# Altium PCB PCB.PcbDoc (part 3 of 3)
Units mm, origin at the board's own origin, x right, y up, seen from the top; angles counter-clockwise.
Board outline 200 x 125 mm, 2 copper layers (Top Layer, Bottom Layer), stack 1.56 mm thick; 157 components, 82 nets, 483 pads, 140 vias.
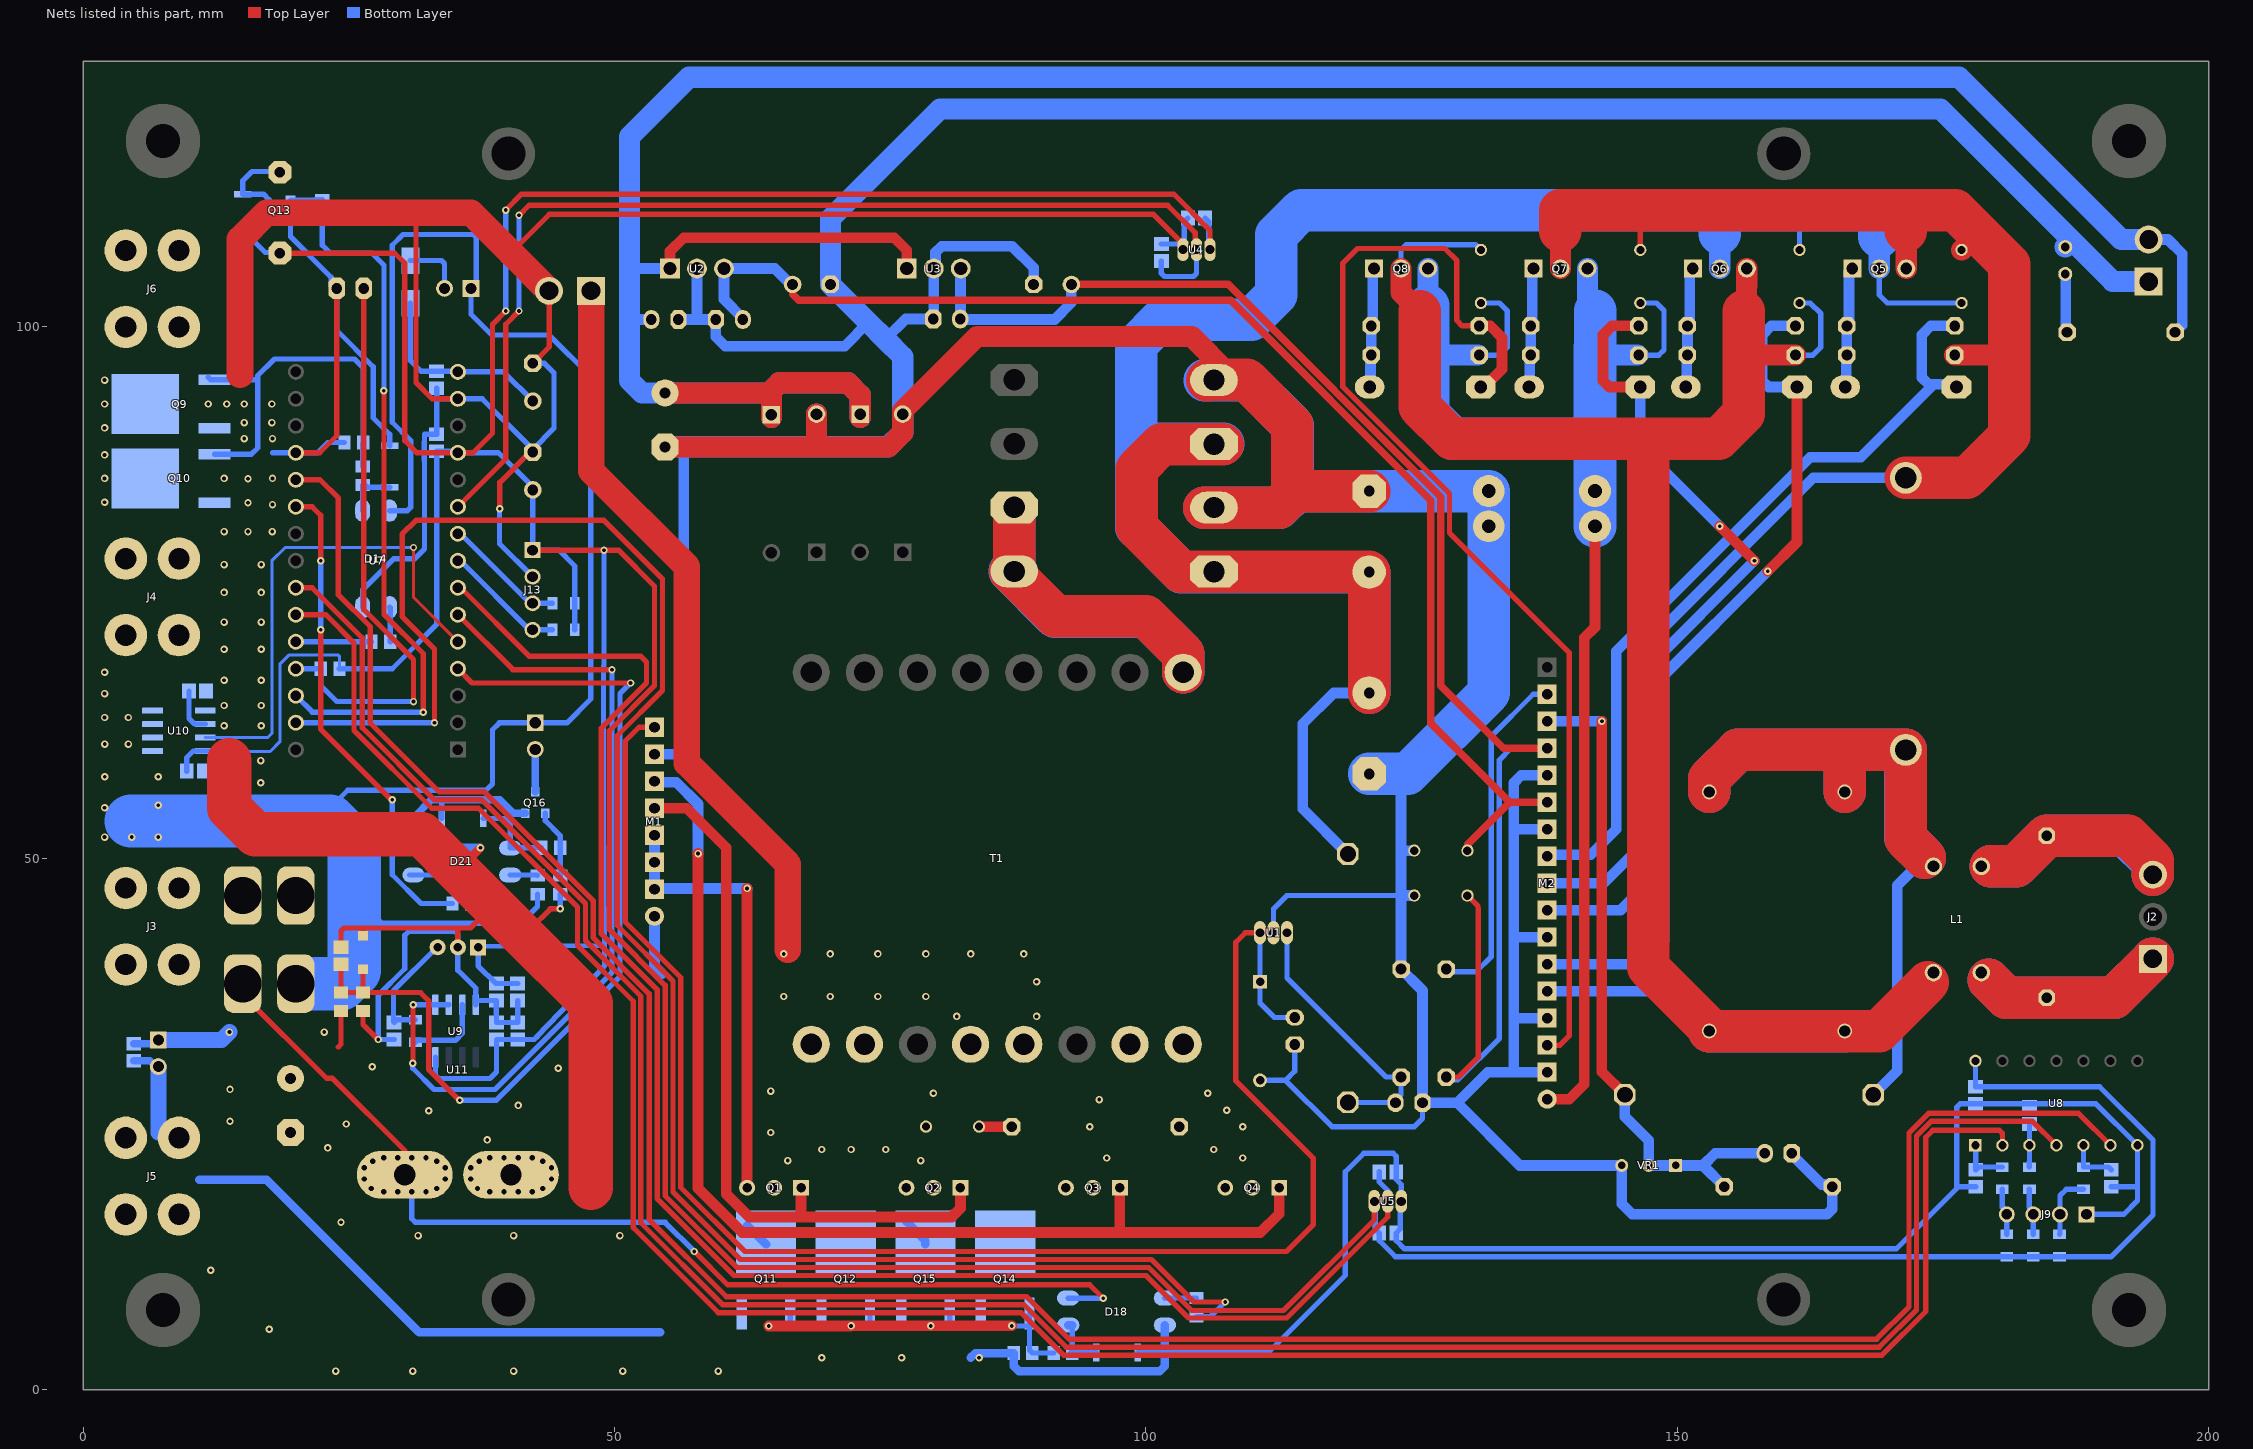
[diagram p2: the nets of this part, all layers, seen from the top]

## Via types
v1: diameter 0.7, hole 0.35, Top Layer to Bottom Layer, 82 vias
v2: diameter 0.7, hole 0.35, Top Layer to Bottom Layer, tented both sides, 55 vias
v3: diameter 0.7, hole 0.35, Top Layer to Bottom Layer, tented top, 3 vias

## Nets (pads, with @x,y where several pads share a name; then routed paths per layer and width w, separated by ;. In a path a pad name is that pad's centre, name@x,y a point inside that pad or via, vN(x,y) a via of type N, cw(c..) or ccw(c..) an arc to the next point about the centre after c; other vN are vias at no path point) (continued)
380VAC-: D8.K D9.A T1.9 | length 53.6
  Top Layer w4: D9.A@87.25,77 D9.A@87.602,77 ; D8.K@87.602,82.4 D9.A@87.602,77 ; T1.9@103.5,67.5 103.5,69.25 99.979,72.771 91.479,72.771 87.602,76.648 D9.A@87.602,77
  Bottom Layer w4: D9.A@87.2,77 91.463,72.737 100.013,72.737 103.5,69.25 T1.9@103.5,67.5 ; D9.A@87.602,77 87.4,77.202 87.602,77.404 D8.K@87.602,82.4
+5: C22.2 C23.2 C25.+ C27.2 C31.2 C33.2 C34.1 C35.2 C36.1 C37.2 C39.1 D17.C J13.1 R19.1 R20.1 R21.1 R29.2 R33.1 R36.1 U4.1 U5.1 U6.+ U7.12 U8.14 U9.8 U10.8 U11.1 | length 556.4
  Top Layer w0.5: U6.+@18.5,106.94 29.31,106.94 30.25,106 30.25,89.303 31.393,88.16 36.66,88.16 38.5,90 38.5,100.25 v1(39.75,101.5) ; v1(39.75,111) 41.25,112.5 102.615,112.5 106.02,109.095 U4.1@106.02,107.275 ; J13.1@42.275,79 42.75,79.475 42.75,79 v1(49,79) 50.35,79 53.75,75.6 53.75,66.25 49.5,62 49.5,43.297 54.75,38.047 54.75,18.25 61.5,11.5 100.256,11.5 104.309,7.447 112.947,7.447 121.48,15.98 U5.1@121.48,17.725
  Bottom Layer w0.3: C36.1@13.75,60.05 17.58,60.05 18.503,60.973 18.503,68.278 19.35,69.125 23.997,69.125 24.097,69.025 R29.2@24.097,67.84
  Bottom Layer w0.5: C35.2@9.74,58.2 9.74,59.49 10.345,60.095 U10.8@11.475,60.095 13.705,60.095 C36.1@13.75,60.05 ; D17.C@15,108.6 15.525,108.6 17.125,107 U6.+@18.5,107 ; R29.2@24.097,67.84 29.077,67.84 33.25,72.013 C27.2@33.25,88.305 35.105,88.305 U7.12@35.25,88.16 39.062,88.16 42.3,84.922 C25.+@42.3,84.672 42.3,79.025 J13.1@42.275,79 44.75,79 46.25,77.5 R33.1@46.25,74 R36.1@46.25,71.5 ; U9.8@33.135,31.28 33.135,29.583 33.428,29.29 38.263,29.29 38.881,29.908 C33.2@38.881,32.95 C34.1@40.881,32.95 42.435,32.95 42.703,33.219 49.047,39.882 49.047,41.789 ; v1(39.75,101.5) v1(39.75,111) ; C39.1@40.87,38.222 C37.2@38.87,38.222 38.82,38.222 37.16,39.882 U11.1@37.16,41.625 37.16,41.7 48.948,41.788 49.047,41.789 ; v1(49,79) 49,68.136 48.947,68.083 48.947,54.188 49.047,42.493 49.047,41.789 ; C22.2@105.55,110.25 105.911,109.889 105.911,107.384 U4.1@106.02,107.275 ; U5.1@121.48,17.725 121.589,17.616 121.589,15.111 C23.2@121.95,14.75 121.95,14.025 123.455,12.52 R19.1@181,12.52 R20.1@183.5,12.52 R21.1@185.95,12.52 186.575,12.52 186.595,12.5 190.8,12.5 194.75,16.45 194.75,23.5 189.75,28.5 C31.2@178.05,28.5 U8.14@178.05,30.94
+5_SEC: C8.+ C9.2 C12.2 M2.14 R5.1 U3.3 | length 148
  Top Layer w0.5: R5.1@128.25,29.42 129.42,29.42 131.25,31.25 131.25,45.25 131.239,45.261 131.239,45.511 C12.2@130.25,46.5
  Top Layer w0.7: C8.+@92.978,104 107.75,104 127.75,84 127.75,66.25 133.64,60.36 M2.14@137.75,60.36
  Bottom Layer w0.5: R5.1@128.25,29.17 129.365,29.17 133.25,33.054 133.25,59.25 134.36,60.36 M2.14@137.75,60.36
  Bottom Layer w1: C9.2@82.52,100.75 82.545,100.775 82.545,105.475 U3.3@82.57,105.5 ; C9.2@82.57,100.7 91.4,100.7 92.978,102.278 C8.+@92.978,104
+12: C21.+ C41.2 D14.4 D18.4 F1.2 F2.2 J7.1 J8.1 J12.1 R30.2 R34.2 U10.1 U10.2 U11.4 | length 290.7
  Top Layer w0.5: F1.2@15,38.2 15,37.2 22.907,29.293 23.457,29.293 30.25,22.5 U11.4@30.25,20.225 ; 24,32.252 24.249,32.501 R30.2@24.249,35.625 ; v2(57.5,13) 60.625,9.875 94.7,9.875 v2(95.975,8.6)
  Bottom Layer w0.5: 10,32.869 10.031,32.9 ; 23.222,53.5 23.222,54.74 24.884,56.401 37.896,56.401 38.5,57.005 38.5,62.1 39.15,62.75 J12.1@42.525,62.75 45.5,62.75 47.75,65 47.75,95.32 43.82,99.25 38.44,99.25 36.491,101.199 J8.1@36.491,103.625 36.991,104.125 36.991,108.407 36.698,108.7 30.087,108.7 29.077,107.69 29.077,91.03 30.8,89.307 30.8,83.013 30.507,82.72 D14.4@28.827,82.72 ; 25.5,46.5 28.111,43.889 41.164,43.889 42.75,45.475 R34.2@42.75,46.625 ; U11.4@30.92,18.625 30.92,16.08 31.25,15.75 54.75,15.75 v2(57.5,13) ; D18.4@92.675,8.62 92.685,8.61 95.965,8.61 v2(95.975,8.6)
  Bottom Layer w0.7: C41.2@4.75,32.55 6.713,32.55 J7.1@7.063,32.9
  Bottom Layer w1.5: J7.1@7.063,32.9 10.031,32.9 13,32.9 v1(13.75,33.65)
  Bottom Layer w5: 4.5,53.5 7.063,53.5 23.222,53.5 25.5,51.222 25.5,46.5 25.5,39.45 24.25,38.2 F2.2@21.1,38.2
  other v1: 32.5,26.25 27.2,30.4 22.671,33.65 2,52 4.563,52 7.063,52 2,54.75 7.063,55 2.025,57.68 7.063,57.68 2.025,60.75 4.25,60.75
  other v2: 24.75,25 13.808,28.25
+12_PRI: J10.01 M1.1 T1.4 T1.5 U11.5 | length 75.4
  Top Layer w2.5: J10.01@47.78,103.4 47.78,86.47 56.79,77.46 56.79,58.96 66.3,49.45 66.3,41.4
  Bottom Layer w1: M1.1@53.75,44.55 53.75,39.825 54.45,39.125
  other v1: 38,23.5 40.92,26.75 44.7,30.25
  other v2: 65.9,37 70.3,37 74.775,37 79.293,37 65.9,41 70.3,41 74.775,41 79.293,41 83.5,41 88.5,41
  other v3: 82.2,35.125 89.705,35.125 89.705,38.39
+12_SEC: C4.+ C5.2 C15.2 M2.12 U2.3 | length 122.8
  Top Layer w0.7: C4.+@66.75,104 66.75,103.072 67.322,102.5 107.973,102.5 126.8,83.673 126.8,62.7 134.22,55.28 ; C15.2@130.25,50.729 130.27,50.749 130.27,51.33 134.22,55.28 ; M2.12@137.75,55.28 134.22,55.28
  Bottom Layer w1: C5.2@62.07,100.7 62.07,100.827 60.29,102.607 U2.3@60.29,105.5 65.074,105.5 66.574,104 C4.+@66.75,104
+18_SEC: C6.+ C7.2 D3.C D5.C J1.02 R1.2 U2.1 U3.1 | length 269.6
  Top Layer w1: U2.1@55.21,105.5 55.21,107.11 56.5,108.4 76.3,108.4 77.49,107.21 U3.1@77.49,105.5
  Top Layer w2: C6.+@54.75,93.79 64.538,93.79 65.498,94.75 71.928,94.75 73.1,93.578 D5.C@73.1,91.8 D5.C@73.1,91.5 ; D3.C@64.75,91.5 D3.C@64.75,91.75 64.75,93.578
  Bottom Layer w1: 51.2,100.7 C7.2@53.46,100.7 ; 51.2,105.5 U2.1@55.21,105.5 ; J1.02@194.35,108.23 196.161,108.23 197.5,106.891 197.5,100.17 R1.2@196.83,99.5
  Bottom Layer w2: D3.C@64.75,91.5 D3.C@64.75,91.75 64.75,93.728 ; D5.C@73.1,91.5 D5.C@73.1,91.8 73.1,93.6 71.95,94.75 65.5,94.75 64.54,93.79 52.572,93.79 51.4,94.962 51.4,105.5 51.4,117.9 57,123.5 176.5,123.5 191.77,108.23 J1.02@194.35,108.23
+380_SEC: C10.+ C11.+ C16.2 C17.2 D7.K D9.K Q5.2 Q6.2 R2.1 | length 235.1
  Top Layer w4: D7.K@107.225,88.975 D7.K@106.398,88.975 101.468,88.975 99.125,86.631 99.125,81.143 103.294,76.975 D9.K@106.398,76.975 120.965,76.975 C10.+@121,76.94 C11.+@121,65.56
  Bottom Layer w0.5: C17.2@161.5,107.25 161.5,111 ; Q5.2@169,105.5 169,103 169.75,102.25 C16.2@176.75,102.25
  Bottom Layer w1: R2.1@119,50.403 114.75,54.653 114.75,62.65 117.66,65.56 C11.+@121,65.56
  Bottom Layer w2: Q6.2@154,105.5 154,108.75 ; Q5.2@169,105.5 169,108.5
  Bottom Layer w4: D7.K@107.25,89 99.1,89 ; C11.+@121,65.56 C10.+@121,76.94 103.323,76.94 99.1,81.163 99.1,89 ; 154,108.75 154,111 ; 169,108.5 169,111 161.5,111 154,111 ; 99.1,89 99.1,98.357 101.443,100.7 109.907,100.7 112.25,103.043 112.25,108.657 114.593,111 154,111
AC_220_L: C18.2 C42.2 L1.1 L2.2 R6.2 | length 95.7
  Top Layer w4: C18.2@153,56.25 153,57.5 155.7,60.2 165.75,60.2 ; C42.2@165.75,56.25 165.75,60.2 ; 173.3,50.05 171.5,51.85 L2.2@171.5,60.2 165.75,60.2
  Bottom Layer w1: R6.2@168.434,27.75 170.687,30.003 170.687,47.437 173.3,50.05
  Bottom Layer w4: C18.2@153,56.25 153,57.5 155.7,60.2 165.75,60.2 ; C42.2@165.75,56.25 165.75,60.2 ; L2.2@171.437,60.137 171.437,51.913 173.3,50.05 ; L2.2@171.5,60.2 165.75,60.2
AC_220_N: C17.1 C18.1 C19.2 C42.1 L1.2 M2.5 Q6.3 Q8.2 R11.1 | length 193.3
  Top Layer w2: Q8.2@124,105.5 124,103.25 125.75,101.5 ; 156.25,97.35 R11.1@161.11,97.35 ; 156.5,101.75 Q6.3@156.54,105.5
  Top Layer w4: 125.75,101.5 125.75,92.5 128.75,89.5 147.25,89.5 ; C18.1@153,33.75 C42.1@165.75,33.75 169,33.75 173.566,38.316 ; C18.1@153,34 147.25,39.75 147.25,89.5 ; 156.25,101.5 156.25,97.35 156.25,91.843 153.907,89.5 147.25,89.5
  Bottom Layer w0.5: Q8.2@124,105.5 124,107.25 124.5,107.75 131.01,107.75 C19.2@131.51,107.25 ; R11.1@161.11,97.35 162.75,97.35 163.5,98.1 163.5,101.25 162.5,102.25 C17.1@161.5,102.25
  Bottom Layer w1: M2.5@137.75,37.5 150.5,37.5 151.708,36.292 151.708,35.042 C18.1@153,33.75
  Bottom Layer w4: C18.1@153,33.75 C42.1@165.75,33.75
BUZZER: R22.1 U7.28 | length 65.3
  Top Layer w0.5: v1(28.274,94) 28.29,93.984 28.29,72.96 32,69.25 v1(32,63.75)
  Bottom Layer w0.5: U7.28@20.01,65.3 21.56,63.75 v1(32,63.75) ; R22.1@22.5,110.207 22.5,107.69 23.25,106.94 27.16,106.94 28.29,105.81 28.29,94.016 v1(28.274,94)
COOLING_FAN: R35.2 U7.21 | length 46.1
  Top Layer w0.5: U7.21@20.01,83.08 21.54,83.08 22.347,82.273 v1(22.347,78) ; v1(22.34,71.5) 22.34,62.16 29,55.5 v1(29.077,55.5)
  Bottom Layer w0.5: v1(22.34,71.5) 22.34,77.993 v1(22.347,78) ; v1(29.077,55.5) 29.077,48.452 31.779,45.75 R35.2@34.75,45.75
DC_BTN: J9.3 R20.2 R25.2 | length 4.4
  Bottom Layer w0.5: R25.2@183.125,18.85 183.125,17.148 183.5,16.773 J9.3@183.5,16.5 R20.2@183.5,14.62
DC_BTN_IN: C29.2 R25.1 U8.3 | length 4.1
  Bottom Layer w0.5: R25.1@183.125,20.95 183.125,21.425 183.13,21.43 U8.3@183.13,23 C29.2@183.13,25
DC_BTN_OUT: U7.24 U8.4 | length 234.1
  Top Layer w0.5: U7.24@20.01,75.46 21.54,75.46 26.25,70.75 26.25,62.3 33.05,55.5 37.5,55.5 47.25,45.75 47.25,42.25 52.453,37.047 52.453,15.703 60.157,8 88.494,8 92.494,4 169,4 172.5,7.5 172.5,23.867 173.883,25.25 183.42,25.25 U8.4@185.67,23
DC_CURRENT_SENSOR: U7.5 U10.7 | length 47.1
  Top Layer w0.3: v1(31.075,79.25) 31.075,74.555 U7.5@35.25,70.38
  Bottom Layer w0.3: U10.7@11.475,61.365 17.365,61.365 17.75,61.75 17.75,78 19,79.25 v1(31.075,79.25)
DC_LOAD_GND: J6.1 Q9.4 Q10.4
  other v1: 2,83.5 2,85.75 2,87.96 2,90.5 2,92.75 2,95
DC_LOAD_VCC: J4.1 U10.3 U10.4
  other v1: 2,63.25 4.25,63.25 2,65.5 2,67.5
DC_SWITCH: R16.2 U7.26 | length 7.1
  Bottom Layer w0.5: U7.26@20.01,70.38 R16.2@27.127,70.38
DEBUG_EN: P1.2 R29.1 U7.27 | length 54.1
  Top Layer w0.5: P1.2@26.39,103.625 26.39,100.878 26.39,100.675 26.39,73.4 31.075,68.715 v1(31.075,64.75)
  Bottom Layer w0.5: U7.27@20.01,67.84 R29.1@22.347,67.84 22.347,66.25 23.847,64.75 v1(31.075,64.75)
EGS002_LOAD_TEMP: C43.2 U4.2 U7.10 | length 103.5
  Top Layer w0.5: U7.10@35.25,83.08 39.75,87.58 39.75,100.25 v1(41,101.5) ; v1(41,110.5) 41.953,111.453 102.041,111.453 104.641,108.854 104.641,107.384 U4.2@104.75,107.275
  Bottom Layer w0.5: v1(41,101.5) v1(41,110.5) ; C43.2@101.443,106.214 101.443,105.043 101.736,104.75 104.457,104.75 104.75,105.043 U4.2@104.75,107.275
EGS_1HO: D11.K M2.6 R9.2 | length 80.5
  Top Layer w1: v2(158.5,77) 161.26,79.76 D11.K@161.26,94.352
  Bottom Layer w1: M2.6@137.75,40.04 146.54,40.04 148.75,42.25 148.75,67.25 v2(158.5,77) ; R9.2@161.11,100.1 158.85,100.1 158,99.25 158,94.937 158.586,94.352 D11.K@161.26,94.352
EGS_1LO: D13.K M2.3 R13.2 | length 112
  Top Layer w0.5: R13.2@131.36,100.1 129.75,100.1 129.25,100.6 129.25,106.25 128.116,107.384 119.894,107.384 118.5,105.99 118.5,94.386 128.553,84.333 128.553,80.618 139.84,69.332 139.84,33.31 138.95,32.42 M2.3@137.75,32.42
  Top Layer w1: R13.2@131.36,100.1 132.4,100.1 133.5,99 133.5,96.024 131.828,94.352 D13.K@131.51,94.352
EGS_2HO: D10.K M2.10 R8.2 | length 75.7
  Bottom Layer w1: M2.10@137.75,50.2 137.9,50.35 141.85,50.35 144.25,52.75 144.25,69.5 162.5,87.75 167.25,87.75 173.875,94.375 173.648,94.602 ; R8.2@176.11,100.1 173.85,100.1 173,99.25 173,95.25 173.648,94.602 ; D10.K@176.26,94.352 176.01,94.602 173.648,94.602
EGS_2LO: D12.K M2.8 R12.2 | length 77.6
  Top Layer w1: R12.2@146.36,100.1 143.85,100.1 143,99.25 143,94.937 143.586,94.352 D12.K@146.51,94.352 ; v2(154,81.25) v2(157.25,78)
  Bottom Layer w1: M2.8@137.75,45.12 144.65,45.12 147.25,47.72 147.25,68 v2(157.25,78) ; D12.K@146.51,94.352 146.51,88.74 148.25,87 v2(154,81.25)
EGS_FB: C14.2 M2.15 R6.1 R7.2 VR1.1 VR1.2 | length 63
  Top Layer w1: v2(142.9,62.9) 142.9,29.916 R6.1@145.066,27.75
  Bottom Layer w1: M2.15@137.75,62.9 v2(142.9,62.9) ; R6.1@145.066,27.75 145.066,25.684 147.3,23.45 VR1.2@147.3,21.1 VR1.1@149.84,21.1 152.42,21.1 ; R7.2@154.42,19.1 152.42,21.1 ; C14.2@158.23,22.25 153.57,22.25 152.42,21.1
EGS_VS2: C16.1 C20.2 L2.1 M2.9 Q5.3 Q7.2 R10.1 | length 154.3
  Top Layer w0.5: C20.2@146.51,107.25 146.51,111
  Top Layer w2: Q7.2@139,105.5 139,109 ; 171.5,109 171.54,108.96 Q5.3@171.54,105.5 ; R10.1@176.11,97.35 181.25,97.35 ; C16.1@176.75,107.25 178.318,108.818
  Top Layer w4: 139,109 139,111 146.51,111 171.5,111 ; L2.1@171.5,85.8 177.25,85.8 181.25,89.8 181.25,97.35 181.25,105.886 176.136,111 171.5,111 ; 171.5,109 171.5,111
  Bottom Layer w1: M2.9@137.75,47.66 143.06,47.66 145.75,50.35 145.75,68.75 162.8,85.8 L2.1@171.5,85.8
FB+: C2.2 D1.C M1.8 U1.3 | length 153.2
  Top Layer w0.5: M1.8@53.75,62.33 52.295,62.33 51,61.035 51,44 56.225,38.775 56.225,19.025 62.25,13 113.207,13 115.75,15.543 115.75,21.75 108.45,29.05 108.45,42.1 109.35,43 U1.3@110.73,43
  Bottom Layer w0.5: U1.3@110.73,43 U1.3@110.73,43 D1.C@110.729,38.39 110.729,36.371 112.08,35.02 C2.2@114,35.02
GND: C21.- C22.1 C23.1 C24.- C25.- C26.1 C27.1 C28.1 C29.1 C30.1 C31.1 C32.1 C33.1 C34.2 C35.1 C36.2 C37.1 C38.1 C39.2 C40.1 C41.1 C43.1 C44.1 D14.2 D15.A D18.2 D19.A D20.1 D21.2 D22.A J5.1 J7.2 J9.1 J10.02 J13.2 P1.1 Q9.3 Q10.3 Q11.3 Q12.3 Q13.2 Q14.3 Q15.3 Q16.2 R18.1 R28.1 R31.1 R38.1 U4.3 U5.3 U7.14 U7.19 U8.7 U9.4 U10.5 U11.2 | length 633.1
  Top Layer w0.5: U7.19@20.01,88.16 22.25,88.16 23.85,89.76 P1.1@23.85,103.625 ; C32.1@24.249,41.625 24.249,43.157 24.542,43.45 26.323,43.45 ; R31.1@26.323,35.625 26.323,34.377 v1(27.75,32.95) ; D20.1@26.323,42.712 26.323,43.45 ; 31.3,110.25 31.3,94.775 32.835,93.24 U7.14@35.25,93.24 ; U11.2@35.25,41.931 35.25,43.45 ; 38.39,45.39 36.45,43.45 35.25,43.45 ; 38.55,45.231 38.55,45.55 ; v1(39.2,82.9) 39.2,85.378 42.05,88.228 C25.-@42.3,88.228 ; 40.235,106.985 43.85,110.6 100.69,110.6 103.48,107.81 U4.3@103.48,107.275 ; 40.65,43.45 42.15,43.45 43.95,45.25 v1(44.875,45.25) ; C24.-@42.3,96.578 43.85,98.128 43.85,103.37 J10.02@43.82,103.4 ; 26.323,43.45 35.25,43.45
  Top Layer w0.8: 35.425,48.675 35.425,49.055 v1(37.37,51)
  Top Layer w2.5: 14.75,95.5 14.75,108.25 17.25,110.75 36.47,110.75 40.235,106.985 J10.02@43.82,103.4
  Top Layer w4.2: 13.75,59.2 13.75,54.717 16.21,52.257 31.843,52.257 35.425,48.675 38.55,45.55 40.65,43.45 47.75,36.35 47.75,19
  Bottom Layer w0.5: 17.808,88.16 U7.19@20.01,88.16 22.035,88.16 23,89.125 R18.1@24.585,89.125 ; Q13.2@19.5,110.05 19.5,108.5 23.334,104.666 23.334,103.891 P1.1@23.6,103.625 ; P1.1@23.85,103.625 23.85,99.69 27.29,96.25 27.29,91.442 28.827,89.905 D15.A@28.827,88.825 ; D14.2@26.287,73.62 26.287,75.26 29.227,78.2 31.2,78.2 32.105,79.105 32.105,87.459 32.097,87.467 32.097,89.143 32.105,89.151 32.105,89.905 C27.1@33.25,89.905 33.25,93.24 ; C38.1@29.25,32.95 v1(27.75,32.95) 27.75,37.104 30.25,39.604 30.25,42.75 30.625,43.125 34.957,43.125 35.25,42.832 U11.2@35.25,41.625 35.25,39.467 36.945,37.772 U9.4@36.945,36.572 ; C26.1@33.25,94.236 33.25,93.24 ; D22.A@33.725,53.75 33.725,55.4 ; U9.4@36.945,36.22 U9.4@36.945,36.572 ; v1(39.2,82.9) 39.172,82.871 39.172,79.603 J13.2@42.275,76.5 ; C39.2@40.87,36.622 40.87,35.236 40.881,35.225 C34.2@40.881,34.55 C33.1@38.881,34.55 38.881,35.225 38.87,35.236 C37.1@38.87,36.622 36.995,36.622 U9.4@36.945,36.572 ; C25.-@42.3,88.228 C25.-@42.3,88.478 ; C24.-@42.3,96.578 43.407,96.578 44.3,95.685 44.3,90.478 C25.-@42.3,88.478 ; v1(44.875,45.25) R38.1@44.875,46.625 ; D19.A@99.229,3.5 101.775,3.5 ; C43.1@101.443,107.814 103.217,107.814 103.48,107.551 U4.3@103.48,107.275 103.589,107.384 103.589,109.889 C22.1@103.95,110.25 ; 101.775,3.55 111.55,3.55 118.75,10.75 118.75,20.5 120.5,22.25 123.257,22.25 123.55,21.957 C44.1@123.55,20.5 123.55,19.775 124.02,19.305 U5.3@124.02,17.725 123.911,17.616 123.911,15.111 C23.1@123.55,14.75 123.55,14.025 124.325,13.25 170.6,13.25 176.3,18.95 176.3,19.1 ; C28.1@178.075,19.1 176.3,19.1 ; J9.1@188.5,16.5 192,16.5 193.29,17.79 193.29,19.1 ; C30.1@190.825,19.1 193.29,19.1 ; 33.25,93.24 U7.14@35.25,93.24 37.538,93.24 C25.-@42.3,88.478 ; 176.3,19.1 176.3,26.607 176.593,26.9 C31.1@178.05,26.9 189.39,26.9 U8.7@193.29,23 193.29,19.1
  Bottom Layer w0.7: C41.1@4.75,30.95 6.276,30.95 6.826,30.4 J7.2@7.063,30.4 ; D21.2@31.075,50.975 31.075,53.825 32.75,55.5 33.825,55.5 ; 33.725,55.4 33.825,55.5 ; Q16.2@41.575,54.25 40.445,54.25 39.195,55.5 33.825,55.5
  Bottom Layer w0.8: 10.93,19.75 17.25,19.75 31.603,5.397 54.281,5.397 ; D21.2@31.075,50.975 37.345,50.975 v1(37.37,51) ; 83.5,3 83.95,3.45 R28.1@87.375,3.45 ; R28.1@87.556,3.45 87.556,2.219 88.024,1.75 101.306,1.75 101.775,2.219 101.775,3.5 101.775,3.55 D18.2@101.775,6.08
  Bottom Layer w1.5: 7.063,24.21 J7.2@7.063,30.4
  other v1: 16.7,57.1 16.7,59.2 13.25,62.47 16.75,62.47 13.25,64.38 16.75,64.38 13.25,66.75 16.75,66.75 13.25,69.681 16.75,69.681 13.25,72.234 16.75,72.234 13.25,75.018 16.75,75.018 13.25,77.643 16.75,77.643 13.25,80.75 15.5,80.75 17.771,80.75 17.808,83.286 15.5,83.464 15.5,85.725 13.25,85.75 17.808,85.75 15.15,89.5 17.808,89.5 15.15,91 17.75,91 11.75,92.75 13.5,92.75 15.15,92.75 17.75,92.75
  other v2: 23.75,1.75 31,1.75 40.489,1.75 50.75,1.75 59.75,1.75 69.5,3 77,3 84.293,3 17.5,5.687 12,11.25 31.5,14.5 40.489,14.5 50.5,14.5 24.25,15.75 23,22.75 13.808,25.25
GND_PRI: M1.2 M1.3 M1.4 Q1.3 Q2.3 Q3.3 Q4.3 Q11.4 Q12.4 Q14.4 Q15.4 | length 47.3
  Top Layer w1: Q1.3@62.46,19 v1(62.46,47.165)
  Bottom Layer w0.8: Q11.4@62.46,15.48 Q11.4@64.25,13.69 ; Q2.3@77.46,19 Q2.3@77.5,18.96 ; Q15.4@77.5,15.765 79.25,14.015 Q15.4@79.25,13.69
  Bottom Layer w1: M1.2@53.75,47.09 M1.2@53.75,47.165 ; M1.4@53.75,52.17 M1.3@53.75,49.63 M1.2@53.75,47.165 ; v1(62.46,47.165) M1.2@53.75,47.165
GND_SEC: C1.1 C2.1 C4.- C5.1 C6.- C7.1 C8.- C9.1 C10.- C11.- C12.1 C14.1 C15.1 D1.A D2.A D4.A D6.A D8.A J1.01 LED1.K M1.7 M2.2 M2.4 M2.7 M2.11 M2.13 R3.2 R7.1 SH1.1 SH2.1 U1.2 U2.2 U3.2 VR1.3 | length 611.7
  Top Layer w2: C6.-@54.75,88.71 69,88.71 ; D4.A@69,91.8 69,88.71 ; D6.A@106.3,95.379 105.921,95 D6.A@106.398,95 ; D6.A@107.825,95.575 104.3,99.1 84.1,99.1 77.1,92.1 D2.A@77.1,91.8 77.1,90.05 75.76,88.71 69,88.71
  Top Layer w4: D8.A@105.5,83 D8.A@106.398,83 112.5,83 113.75,84.25 ; D6.A@105.775,95 D6.A@105.921,95 ; D6.A@106.423,95.025 109.475,95.025 113.75,90.75 113.75,84.25 ; C10.-@121,84.56 114.06,84.56 113.75,84.25
  Bottom Layer w0.5: D1.A@110.729,29.11 113.137,29.11 ; U1.2@112,43 112,45.25 113.25,46.5 124,46.5 ; C2.1@114,32.48 114,29.973 113.137,29.11 ; C1.1@126.02,27 126.02,25.52 125.25,24.75 117.497,24.75 113.137,29.11
  Bottom Layer w1: M1.7@53.75,59.79 55.69,59.79 56.5,60.6 56.5,88.724 ; C7.1@56,100.7 58,100.7 ; U2.2@57.75,105.5 57.75,100.95 58,100.7 ; 73.875,100.431 71.644,98.2 60.4,98.2 59.53,99.07 C5.1@59.53,100.7 58,100.7 ; 75.468,98.838 77.38,100.75 C9.1@79.98,100.75 80.035,100.805 80.035,105.495 U3.2@80.03,105.5 80.195,105.665 80.195,107.014 80.78,107.6 87.386,107.6 89.422,105.564 C8.-@89.422,104 ; 123.721,57.94 124,58.219 124,50.729 ; R3.2@123.794,39.786 126.02,37.56 C1.1@126.02,27 129.275,27 ; R3.2@124,39.58 124,46.5 ; C12.1@125.25,46.5 124,46.5 ; C15.1@125.25,50.729 124,50.729 ; 134.56,29.895 134.575,29.88 ; 134.59,29.895 134.59,35 ; M2.2@137.75,29.88 134.575,29.88 ; M2.4@137.75,34.96 134.63,34.96 134.59,35 ; M2.7@137.75,42.58 134.67,42.58 134.59,42.5 ; M2.11@137.75,52.74 134.6,52.74 134.59,52.75 ; M2.13@137.75,57.82 135.32,57.82 134.59,57.09 134.59,52.75 ; C14.1@160.77,22.25 160.77,22.123 163.587,19.306 164.374,19.306 R7.1@164.58,19.1 164.58,17 164.08,16.5 145.75,16.5 144.76,17.49 VR1.3@144.76,21.1 135.175,21.1 129.275,27 ; 124,46.5 124,50.729 ; 129.275,27 132.155,29.88 134.575,29.88 ; 134.59,35 134.59,42.5 ; 134.59,42.5 134.59,52.75
  Bottom Layer w2: C6.-@54.764,88.724 56.5,88.724 69.275,88.724 ; D4.A@69,91.8 69,89 69.275,88.725 ; LED1.K@186.5,107.52 187.105,108.125 187.125,108.125 ; J1.01@193.25,104.27 190.98,104.27 187.125,108.125 ; 69.275,88.725 75.75,88.725 77.1,90.075 D2.A@77.1,91.8 77.1,97.206 75.468,98.838 73.875,100.431 C4.-@70.306,104 70.306,110.194 80.612,120.5 174.75,120.5 187.125,108.125
  Bottom Layer w4: D8.A@105.5,83 D8.A@106.398,83 112.55,83 113.8,84.25 113.8,90.7 109.5,95 D6.A@106.398,95 D6.A@105.55,95 ; 114.31,84.56 C10.-@121,84.56 129.5,84.56 ; C11.-@121,57.94 124.62,57.94 132.25,65.57 SH2.1@132.25,81.25 SH1.1@132.25,84.56 129.75,84.56
INV_SENSE_OUT: C38.2 R32.1 U11.3 | length 10.9
  Bottom Layer w0.5: C38.2@29.195,34.6 29.195,37.555 33.265,41.625 U11.3@33.34,41.625 ; C38.2@29.25,34.55 29.5,34.8 R32.1@31.25,34.8
INVERTER_BTN: J9.4 R19.2 R24.2 | length 4.4
  Bottom Layer w0.5: R24.2@180.575,18.85 180.575,17.177 181,16.752 R19.2@181,14.62
INVERTER_BTN_IN: C28.2 R24.1 U8.1 | length 4.9
  Bottom Layer w0.5: U8.1@178.075,22.975 C28.2@178.075,20.7 178.188,20.813 178.325,20.95 R24.1@180.575,20.95
INVERTER_BTN_OUT: U7.25 U8.2 | length 228.4
  Top Layer w0.5: U7.25@20.01,72.92 22.83,72.92 25.476,70.274 25.476,62.024 32.79,54.71 37.193,54.71 46.5,45.403 46.5,41.797 51.75,36.547 51.75,15.25 59.75,7.25 88.25,7.25 92.25,3.25 169.25,3.25 173.383,7.383 173.383,23.75 174.043,24.41 180.297,24.41 180.59,24.117 U8.2@180.59,23
INVERTER_SWITCH: R23.2 U7.29 | length 180.5
  Top Layer w0.5: v1(33.05,62.75) 33.05,69.7 30,72.75 30,80.5 31.3,81.8 49,81.8 54.5,76.3 54.5,65.785 50.25,61.535 50.25,43.703 55.5,38.453 55.5,18.601 61.851,12.25 100.5,12.25 104.5,8.25 v2(107.46,8.25)
  Bottom Layer w0.5: U7.29@20.01,62.76 20.015,62.755 33.045,62.755 v1(33.05,62.75) ; R23.2@104.75,6.875 106.085,6.875 v2(107.46,8.25)
INVERTOR_CURRENT_SENSOR: U7.6 U9.1 U9.2 | length 78.6
  Top Layer w0.5: v1(31,30.71) 31.025,30.735 31.025,36.195 v1(31.05,36.22) ; U7.6@35.25,72.92 40.42,67.75 v1(49.75,67.75)
  Bottom Layer w0.5: v1(31,30.71) 31,30.25 33,28.25 38.744,28.25 49.75,39.256 v1(49.75,67.75) ; v1(31.05,36.22) U9.1@33.135,36.22 U9.2@34.405,36.22
LCD_BTN: J9.2 R21.2 R26.2 | length 6.1
  Bottom Layer w0.5: R21.2@185.95,14.62 186,14.67 186,18.255 186.595,18.85 R26.2@188.225,18.85
LCD_BTN_IN: C30.2 R26.1 U8.5 | length 4.8
  Bottom Layer w0.5: R26.1@188.21,20.95 U8.5@188.21,23 ; R26.1@188.225,20.95 190.575,20.95 C30.2@190.825,20.7
LCD_BTN_OUT: U7.20 U8.6 | length 249
  Top Layer w0.5: U7.20@20.01,85.62 22.28,85.62 24,83.9 24,74.795 27,71.795 27,62.75 33.5,56.25 37.75,56.25 48,46 48,42.5 53.25,37.25 53.25,16 60.5,8.75 88.75,8.75 92.75,4.75 168.75,4.75 171.797,7.797 171.797,24.158 173.638,26 187.75,26 U8.6@190.75,23
LCD_I2C_SCL: J13.3 R33.2 U7.9 | length 11.6
  Bottom Layer w0.5: U7.9@35.25,80.54 35.493,80.54 42.033,74 J13.3@42.275,74 R33.2@44.15,74
LCD_I2C_SDA: J13.4 R36.2 U7.8 | length 11.6
  Bottom Layer w0.5: U7.8@35.25,78 35.5,78 42,71.5 J13.4@42.275,71.5 R36.2@44.15,71.5
NetC1_2: C1.2 R2.2 R3.1 U1.1 | length 26
  Bottom Layer w0.5: U1.1@113.27,43 113.27,38.73 122.58,29.42 R3.1@124,29.42 124,27.721 123.48,27.201 C1.2@123.48,27 123.463,27.017 119.017,27.017 R2.2@119,27.035
NetC3_2: C3.2 R4.1 | length 3.1
  Top Layer w1: C3.2@84.293,24.75 R4.1@87.376,24.75
NetC13_1: C13.1 J2.1 L1.3 | length 35.3
  Top Layer w4: 179.3,38.55 180.97,36.88 C13.1@184.75,36.88 191.09,36.88 J2.1@194.75,40.54
  Bottom Layer w4: 179.3,38.55 180.97,36.88 C13.1@184.75,36.88 191.09,36.88 J2.1@194.75,40.54
NetC13_2: C13.2 J2.3 L1.4 | length 37.3
  Top Layer w4: 179.5,49.25 181.88,49.25 C13.2@184.75,52.12 192.407,52.12 194.75,49.777 J2.3@194.75,48.46
  Bottom Layer w4: 179.5,49.25 181.88,49.25 C13.2@184.75,52.12 192.2,52.12 194.75,49.57 J2.3@194.75,48.46
NetC40_2: C40.2 U10.6 | length 4.3
  Bottom Layer w0.5: C40.2@9.95,65.75 9.95,63.15 10.465,62.635 U10.6@11.475,62.635
NetD10_A: D10.A Q5.1 R8.1 R10.2 | length 11.4
  Bottom Layer w1: D10.A@165.8,94.352 165.875,94.427 165.875,97.275 R10.2@165.95,97.35 R8.1@165.95,100.1 166.156,100.306 166.156,105.196 Q5.1@166.46,105.5
NetD11_A: D11.A Q6.1 R9.1 R11.2 | length 11.4
  Bottom Layer w1: D11.A@150.8,94.352 150.875,94.427 150.875,97.275 R11.2@150.95,97.35 R9.1@150.95,100.1 151.156,100.306 151.156,105.196 Q6.1@151.46,105.5
NetD12_A: D12.A Q7.1 R12.1 R14.2 | length 11.3
  Bottom Layer w1: D12.A@136.05,94.352 136.125,94.427 136.125,97.275 R14.2@136.2,97.35 R12.1@136.2,100.1 136.33,100.23 136.33,105.37 Q7.1@136.46,105.5
NetD13_A: D13.A Q8.1 R13.1 R15.2 | length 11.3
  Bottom Layer w1: D13.A@121.05,94.352 121.125,94.427 121.125,97.275 R15.2@121.2,97.35 R13.1@121.2,100.1 121.33,100.23 121.33,105.37 Q8.1@121.46,105.5
NetD14_1: D14.1 R16.1 | length 3.3
  Bottom Layer w0.5: D14.1@28.827,73.62 28.877,73.57 R16.1@28.877,70.38
NetD14_3: D14.3 D15.C R17.1 | length 5
  Bottom Layer w0.5: D14.3@26.287,82.72 R17.1@26.287,85.125 26.51,85.125 26.71,84.925 D15.C@28.827,84.925
NetD16_1: D16.1 J8.2 | length 5.7
  Bottom Layer w0.5: D16.1@30.773,106.25 33.698,106.25 33.991,105.957 J8.2@33.991,103.625
NetD17_A: D17.A Q13.3 U6.- | length 8.8
  Bottom Layer w0.5: Q13.3@17.5,111 17.5,111.957 16.957,112.5 D17.A@15,112.5 15,113.75 15.87,114.62 U6.-@18.5,114.62
NetD18_1: D18.1 R23.1 | length 3
  Bottom Layer w0.5: D18.1@101.785,8.61 D18.1@101.775,8.62 101.78,8.625 R23.1@104.75,8.625
NetD18_3: D18.3 D19.C R27.1 | length 5.3
  Bottom Layer w0.5: R27.1@93.061,3.45 D18.3@93.061,6.08 ; R27.1@93.112,3.5 95.004,3.5
  Bottom Layer w0.54: 95.004,3.5 D19.C@95.329,3.5
  Bottom Layer w0.8: D18.3@92.675,6.08 D18.3@93.061,6.08 ; R27.1@93.061,3.45 R27.1@93.112,3.5
NetD21_1: D21.1 R35.1 | length 7.7
  Bottom Layer w0.5: D21.1@30.725,48.435 D21.1@31.075,48.435 35.23,48.435 36.5,47.165 R35.1@36.5,45.75
NetD21_3: D21.3 D22.C R37.1 | length 8
  Bottom Layer w0.5: D22.C@37.625,53.75 39.638,53.75 40.175,53.212 D21.3@40.175,50.975 40.2,51 R37.1@43.125,51
NetD21_4: D21.4 R34.1 | length 2.6
  Bottom Layer w0.5: D21.4@40.175,48.435 42.69,48.435 R34.1@42.75,48.375
NetF1_1: F1.1 F2.1 J3.1
NetHS1_1: 
NetHS2_1: 
NetJ12_2: J12.2 Q16.3 | length 4
  Bottom Layer w0.7: Q16.3@42.525,56.25 J12.2@42.525,60.25
NetLED1_A: LED1.A R1.1 | length 5.6
  Bottom Layer w1: LED1.A@186.5,104.98 186.561,104.919 186.561,99.609 R1.1@186.67,99.5
NetM2_16: M2.16 R5.2 | length 32.5
  Bottom Layer w0.5: R5.2@128.25,39.33 131.08,39.33 132.5,40.75 132.5,61.5 136.44,65.44 M2.16@137.75,65.44
NetQ9_1: Q9.1 Q10.1 R17.2 R18.2 | length 36.1
  Bottom Layer w0.5: Q9.1@11.75,95.271 11.985,95.036 Q9.1@12.365,95.036 16.414,95.036 ; Q10.1@12.365,88.036 15.825,88.036 16.414,88.625 16.414,95.036 ; R17.2@26.287,86.875 26.287,89.077 R18.2@26.335,89.125 26.335,96.165 25.513,96.987 17.987,96.987 16.414,95.414 16.414,95.036
NetQ11_1: Q11.1 Q12.1 Q14.1 Q15.1 R27.2 R28.2 | length 39.1
  Top Layer w1: v2@64.507,6 64.51,5.997 72.247,5.997 v2(72.25,6) v2(79.75,6) v2(87.376,6)
  Bottom Layer w0.5: v2(64.5,5.993) 66.301,5.993 66.536,6.228 Q11.1@66.536,7.16 ; v2@72.3,6.05 v2(72.25,6) 73.801,6 74.036,6.235 Q12.1@74.036,7.16 ; v2(79.75,6) 81.301,6 81.536,6.235 Q15.1@81.536,7.16 ; v2(87.376,6) Q14.1@89.071,6 ; Q14.1@89.036,7.16 89.036,3.719 R28.2@89.306,3.45 R27.2@91.311,3.45
NetQ13_1: Q13.1 R22.2 | length 3
  Bottom Layer w0.5: Q13.1@19.5,111.95 21.792,111.95 21.8,111.957 R22.2@22.5,111.957
NetQ16_1: Q16.1 R37.2 R38.2 | length 6.5
  Bottom Layer w0.5: Q16.1@43.475,54.25 43.475,53.546 44.875,52.146 R37.2@44.875,51 R38.2@44.875,48.375
NetR32_2: R32.2 U9.3 | length 7.5
  Bottom Layer w0.5: R32.2@31.25,32.7 31.419,32.869 35.009,32.869 35.675,33.535 U9.3@35.675,36.22
PWM_A: M1.5 Q1.1 Q2.1 | length 68.6
  Top Layer w1: M1.5@53.75,54.71 56.79,54.71 60.5,51 60.5,18.412 62.662,16.25 67.54,16.25 81.705,16.25 82.54,17.085 Q2.1@82.54,19 ; 67.54,16.5 Q1.1@67.54,19
PWM_B: M1.6 Q3.1 Q4.1 | length 104.9
  Top Layer w1: v1(57.85,50.45) 57.85,18.958 62.018,14.79 97.54,14.79 ; Q3.1@97.54,19 97.54,14.79 ; Q4.1@112.54,19 112.54,16.565 110.765,14.79 97.54,14.79
  Bottom Layer w1: M1.6@53.75,57.25 53.835,57.165 55.793,57.165 57.85,55.107 v1(57.85,50.45)
SHT: C19.1 C20.1 M2.1 Q7.3 Q8.3 R14.1 R15.1 SH1.2 SH2.2 | length 137.5
  Top Layer w1: M2.1@137.75,27.34 139.84,27.34 141.25,28.75 141.25,70.75 142.25,71.75 SH2.2@142.25,81.25
  Bottom Layer w0.5: R15.1@131.36,97.35 133.25,97.35 134,98.1 134,101.5 133.25,102.25 C19.1@131.51,102.25 ; R14.1@146.36,97.35 148.25,97.35 148.75,97.85 148.75,101.531 148.031,102.25 C20.1@146.51,102.25
  Bottom Layer w2: 126.54,97.35 R15.1@131.242,97.35 ; 126.54,102 Q8.3@126.54,105.5 ; 141.54,102.25 Q7.3@141.54,105.5 ; 142.25,97.35 R14.1@146.243,97.35
  Bottom Layer w4: 126.54,102 126.54,97.35 126.54,91.843 128.883,89.5 142.25,89.5 ; SH2.2@142.25,81.25 142.25,89.5 ; 142.25,98.1 142.25,89.5 ; 142.259,98.1 142.259,101.531
TL494_LOAD_TEMP: C44.2 U5.2 U7.7 | length 157
  Top Layer w0.5: U7.7@35.25,75.46 35.515,75.46 41.975,69 52.465,69 53,68.465 53,66.5 48.75,62.25 48.75,42.897 54,37.647 54,18 61.25,10.75 100.011,10.75 104.017,6.744 113.244,6.744 122.75,16.25 U5.2@122.75,17.725
  Bottom Layer w0.5: C44.2@121.95,20.5 121.95,19.55 122.75,18.75 U5.2@122.75,17.725
TR_IN+: C3.1 Q1.2 Q2.2 T1.1 T1.2
  other v2: 66.3,21.561 78.8,21.561 69.5,22.6 72.25,22.6 75.5,22.6 64.7,24.2 80,27.9 64.7,28.1
TR_IN-: Q3.2 Q4.2 R4.2 T1.7 T1.8
  other v2: 96.3,21.8 109.1,21.8 106.375,22.6 94.7,24.75 109.1,24.75 107.6,26.3 95.6,27.3 105.8,27.9
VIN: C24.+ C26.2 D16.2 U7.15 | length 18.6
  Bottom Layer w0.5: D16.2@30.773,102.25 30.773,96.852 31.789,95.836 C26.2@33.25,95.836 ; C26.2@33.2,95.836 35.194,95.836 U7.15@35.25,95.78 39.542,95.78 C24.+@42.3,93.022
VOLTAGE_SENSOR: C32.2 D20.2 R30.1 R31.2 U7.4 | length 88.8
  Top Layer w0.5: C32.2@24.249,40.025 24.249,39.35 R30.1@24.249,37.375 R31.2@26.323,37.375 ; D20.2@26.323,39.562 R31.2@26.323,37.375 ; U7.4@35.25,67.84 36.59,66.5 v1(51.5,66.5) ; v1(35.42,27.225) 32.5,30.145 32.5,36.6 31.75,37.35 31.75,37.375 R31.2@26.323,37.375
  Bottom Layer w0.5: v1(35.42,27.225) 38.85,27.225 50.5,38.875 50.5,65.5 v1(51.5,66.5)
pads on no net: HS1.1 HS2.1 J2.2 M2.17 T1.3 T1.6 T1.10 T1.11 T1.12 T1.14 U7.1 U7.2 U7.3 U7.11 U7.13 U7.16 U7.17 U7.18 U7.22 U7.23 U7.30 U8.8 U8.9 U8.10 U8.11 U8.12 U8.13 U9.5 U9.6 U9.7

## Polygon pours and split planes (outlines as drawn)
+12 on Bottom Layer "+12_L02_P010" (solid, remove dead copper, pour order 10): 12.75,40.475 12.75,27.975 13.5,27.225 21.5,27.225 25,23.725 25,18.725 26.65,17.075 33.6,17.075 35,18.475 35,24.246 33.817,26.562 22.34,34.859 22.34,40.635 21.75,41.225 13.5,41.225
GND on Bottom Layer "GND_L02_P076" (solid, remove dead copper, pour order 76): 11,96.75 18,96.75 18.5,96.25 18.5,57.013 17.889,56.401 9.349,56.401 8.75,57 8.75,67.12 9.63,68 11.875,68 12.5,68.625 12.5,81 12,81.5 11,81.5 10.375,82.125 10.375,96.125
DC_LOAD_GND on Bottom Layer "DC_LOAD_GND_L02_P062" (solid, remove dead copper, pour order 62): 1.25,109 1.25,83.5 1.87,82.88 9.13,82.88 9.75,83.5 9.75,97.5 11,97.5 11.75,98.25 11.75,109 11,109.75 2,109.75
+12 on Bottom Layer "+12_L02_P054" (solid, remove dead copper, pour order 54): 7.365,61.75 1.75,61.75 1.25,61.25 1.25,51.785 2.035,51 8,51 8,61.115
DC_LOAD_VCC on Bottom Layer "DC_LOAD_VCC_L02_P050" (solid, remove dead copper, pour order 50): 1.5,80.75 11.25,80.75 11.75,80.25 11.75,69.025 11.225,68.5 8.5,68.5 8,68 8,62.75 7.5,62.25 1.75,62.25 1.25,62.75 1.25,80.5
GND_PRI on Bottom Layer "GND_PRI_L02_P030" (solid, remove dead copper, pour order 30): 93.825,17.25 104.384,17.25 105.125,17.991 105.125,20 108.4,20 108.4,10.75 107.804,10.154 93.275,10.154 61.336,10.154 60.75,10.739 60.75,20 63.25,20 63.25,17.833 63.833,17.25 75.325,17.25 75.75,17.675 75.75,20 78.25,20 78.25,17.65 78.65,17.25 90.247,17.25 90.736,17.739 90.736,20 93.275,20 93.275,17.8
GND on Bottom Layer "GND_L02_P014" (solid, remove dead copper, pour order 14): 23.75,23.075 23.75,17.5 26.25,15 52.1,15 58.35,8.75 62.719,8.75 62.719,4.75 68.75,4.75 68.75,8.75 70.25,8.75 70.25,4.75 76.263,4.75 76.263,8.868 77.749,8.868 77.75,4.75 83.75,4.75 83.75,8.868 85.25,8.868 85.25,4.75 85.25,2.25 84.25,1.25 60,1.25 23.311,1.25 19.366,2.884 8.25,14 1.75,14 1.25,14 1.25,26.25 2.5,26.25 20.477,26.25
TR_IN- on Bottom Layer "TR_IN-_L02_P022" (solid, remove dead copper, pour order 22): 111.1,18 108.9,18 108.9,21 107.9,22 97.6,22 96.171,20.571 96.171,18 94,18 94,27.01 cw(c108.346,11.187) 96.171,28.735 96.171,34.671 97.25,35.75 104.75,35.75 105.8,34.7 105.8,29.2 111.1,23.9
TR_IN+ on Bottom Layer "TR_IN+_L02_P020" (solid, remove dead copper, pour order 20): 81.031,18 79.031,18 79.031,20.2 77.231,22 67.769,22 66.031,20.262 66.031,18 64.031,18 64.031,34.5 65.281,35.75 74.781,35.75 75.781,34.75 75.781,29.719 76.5,29 79.781,29 81.031,27.75
+12_PRI on Bottom Layer "+12_PRI_L02_P016" (solid, remove dead copper, pour order 16): 35.5,22.25 35.5,18.5 36.9,17.1 42.832,17.1 43.979,17.575 62.904,36.5 80,36.5 81.5,35 81.5,30.5 82.5,29.5 89.5,29.5 90.5,30.5 90.5,40 89,41.5 56.457,41.5 53.543,40.293
NetF1_1 on Bottom Layer "NETF1_1_L02_P008" (solid, remove dead copper, pour order 8): 2,37.5 10.93,37.5 11.75,38.32 11.75,42.75 12.5,43.5 21.561,43.5 22.34,44.279 22.34,49.004 21.594,49.75 11.75,49.75 2.375,49.75 1.25,48.625 1.25,38.25
GND on Top Layer "GND_L01_P080" (solid, remove dead copper, pour order 80): 45.65,19.694 49.85,19.694 49.85,13.944 45.65,13.944
+12_PRI on Top Layer "+12_PRI_L01_P081" (solid, remove dead copper, pour order 81): 44.923,31.673 35.5,22.25 35.5,18.456 36.856,17.1 42.846,17.1 43.962,17.562 44.845,18.445 45.325,19.604 45.325,31.506
+12_PRI on Top Layer "+12_PRI_L01_P078" (solid, remove dead copper, pour order 78): 64.4,36.5 79.955,36.5 81.455,35 81.455,30.5 82.455,29.5 89.455,29.5 90.455,30.5 90.455,40 88.955,41.5 64.4,41.5 63.9,41 63.9,37
GND on Top Layer "GND_L01_P074" (solid, remove dead copper, pour order 74): 11,96.75 18,96.75 18.5,96.25 18.5,57.013 17.55,56.063 9.687,56.062 8.75,57 8.75,67.12 9.63,68 11.875,68 12.5,68.625 12.5,81 12,81.5 11,81.5 10.375,82.125 10.375,96.125
+12 on Top Layer "+12_L01_P066" (solid, remove dead copper, pour order 66): 7.375,61.75 1.75,61.75 1.25,61.25 1.25,51.775 2.025,51 8,51 8,61.125
DC_LOAD_GND on Top Layer "DC_LOAD_GND_L01_P064" (solid, remove dead copper, pour order 64): 1.25,109 1.25,83.5 1.87,82.88 9.13,82.88 9.75,83.5 9.75,97.5 11,97.5 11.75,98.25 11.75,109 11,109.75 2,109.75
DC_LOAD_VCC on Top Layer "DC_LOAD_VCC_L01_P060" (solid, remove dead copper, pour order 60): 1.5,80.75 11.25,80.75 11.75,80.25 11.75,69.025 11.225,68.5 8.5,68.5 8,68 8,62.75 7.5,62.25 1.75,62.25 1.25,62.75 1.25,80.5
+12 on Top Layer "+12_L01_P046" (solid, remove dead copper, pour order 46): 12.775,40.475 12.775,27.975 13.525,27.225 21.525,27.225 24.997,23.753 24.997,18.753 26.65,17.1 33.65,17.1 35.025,18.475 35.025,24.246 33.842,26.562 22.365,34.859 22.365,40.635 21.775,41.225 13.525,41.225
NetF1_1 on Top Layer "NETF1_1_L01_P044" (solid, remove dead copper, pour order 44): 2,37.45 10.93,37.45 11.75,38.27 11.75,42.7 12.5,43.45 21.561,43.45 22.34,44.228 22.34,48.954 21.594,49.7 11.75,49.7 2.375,49.7 1.25,48.575 1.25,38.2
TR_IN- on Top Layer "TR_IN-_L01_P042" (solid, remove dead copper, pour order 42): 111.1,18.025 108.9,18.025 108.9,21.025 107.9,22.025 97.6,22.025 96.171,20.596 96.171,18.025 94,18.025 94,27.035 cw(c108.346,11.212) 96.171,28.76 96.171,34.671 97.275,35.775 104.745,35.775 105.8,34.72 105.8,29.225 111.1,23.925
TR_IN+ on Top Layer "TR_IN+_L01_P036" (solid, remove dead copper, pour order 36): 81.025,18 79.025,18 79.025,20.2 77.225,22 67.763,22 66.025,20.263 66.025,18 64.025,18 64.025,34.5 65.275,35.75 74.775,35.75 75.775,34.75 75.775,29.738 76.512,29 79.775,29 81.025,27.75
GND on Top Layer "GND_L01_P034" (solid, remove dead copper, pour order 34): 20.5,26.25 23.75,22.997 23.745,17.506 26.249,15 51.1,15 61.35,4.75 68.75,4.75 70.25,4.75 76.263,4.75 77.75,4.75 83.75,4.75 85.25,4.75 85.25,2.25 84.25,1.25 60,1.25 23.311,1.25 19.366,2.884 8.25,14 1.75,14 1.25,14 1.25,26.25 2.5,26.25 20.477,26.25

## Other copper
Bottom Layer:
  region net GND_PRI: 63.25,11.313 63.563,11 91,11 91,16.007 90.473,15.48 63.25,15.48

## Silkscreen, mask and mechanical layers (free items; w line width, h text height)
Top Overlay:
  text "BZ" at 17.25,117.5 h2.25
  text "+" at 197.75,112 h2.54 r270
  text "+" at 185.875,103.725 h2.54 r270
  text "SW" at 31.325,102.25 h3.25 r90
  text "CHG" at 41.5,102.25 h3.25 r90
  text "-" at 197.75,102 h3.54 r270
  text "Debug EN" at 22,100.763 h1.54
  text "+" at 48.75,97.5 h3.25 r90
  text "DC-" at 8.5,97 h4.52 r270
  text "18V DC" at 185.75,94.75 h4.52
  text "I2C" at 45.25,78.75 h4.52 r270
  text "DC+" at 8.5,67.84 h4.52 r270
  text "Fan" at 45.75,64.75 h4.52 r270
  text "+" at 37,63.75 h3.54 r270
  text "-" at 37,61 h3.54 r270
  text "BAT+" at 2.5,59.75 h4.52 r270
  text "220V AC" at 183.5,56 h4.52
  text "L" at 198,53 h4.52 r90
  text "EC42/EE42" at 75.75,47.75 h4.52
  text "N" at 198,35.983 h4.52 r90
  text "12V" at 0.5,35 h4.52 r270
  text "+" at 9.75,34 h3.54 r270
  text "-" at 9.75,31.195 h3.54 r270
  text "BAT-" at 0.75,13.5 h4.52 r270
  text "Buttons" at 193.1,12.7 h2.52 r90
  text "EN" at 186.1,11.125 h2.52 r90
  text "DC" at 183.8,10.961 h2.52 r90
  text "AC" at 181.6,10.951 h2.52 r90
  text "GND" at 188.1,9.1 h2.52 r90
Bottom Overlay:
  drawing of 18 lines, arcs and shapes, not listed
  text "Vcc" at 40.888,78.393 h1.54
  text "GND" at 40.92,75.996 h1.54
  text "SCL" at 40.92,73.496 h1.54
  text "SDA" at 40.92,70.996 h1.54
  text "CAUTION / HIGH VOLTAGE!" at 185.9,66.75 h5.52
  text "18V" at 74.5,59.5 h4.52
  text "380V" at 98.5,59.5 h4.52
  text "Pure sinus inverter 12V-220V 500W v1.3" at 187.9,1.5 h4.52
Top Solder:
  region: 45.65,16.7 49.85,16.7 49.85,19.05 49.839,19.039 45.65,19.039
Bottom Solder:
  region: 7.314,23.893 28.957,2.25 84.5,2.25 85,2.75 85,4.075 30.672,4.075 10.747,24
  region: 1.5,51.75 1.5,58.475 2.275,59.25 6.7,59.25 7.5,58.45 7.5,51.75 6.75,51 2.25,51
  region: 38.75,21.95 56.162,39.362 58.486,40.325 88.875,40.325 90.35,38.85 90.35,31.25 89.5,30.4 82.4,30.4 81.6,31.2 81.6,36.925 80.925,37.6 60.21,37.6 58.315,36.815 43.45,21.95
  region: 66.5,15.5 108.25,15.5 108.25,11 66.5,11
  region: 106.375,20.006 106.375,15.25 108.25,15.25 108.25,19.988
  region: 91.375,19.982 91.375,15 93.25,15 93.25,19.964
  region: 76.375,19.994 76.375,16.75 78.25,16.75 78.25,19.976
  region: 63.25,19.976 61.35,19.976 61.35,16.75 63.25,16.75
Board outline:
  the board outline again, w0.2

## Dimensions
200,125 to 200,0 on PCBM Notes
0,0 to 200,0 on PCBM Notes

## Text inside footprints (layer, text, board x,y; h text height)
T1: Top Overlay "1" at 68.8,36.7 h2.54 r180; Top Overlay "8" at 104.2,36.5 h2.54 r180; Top Overlay "9" at 104.2,64.9 h2.54 r180; Top Overlay "16" at 69.5,65 h2.54 r180